# EAGLE board Fuel Gauge v1.0 (EAGLE 8.1.0)
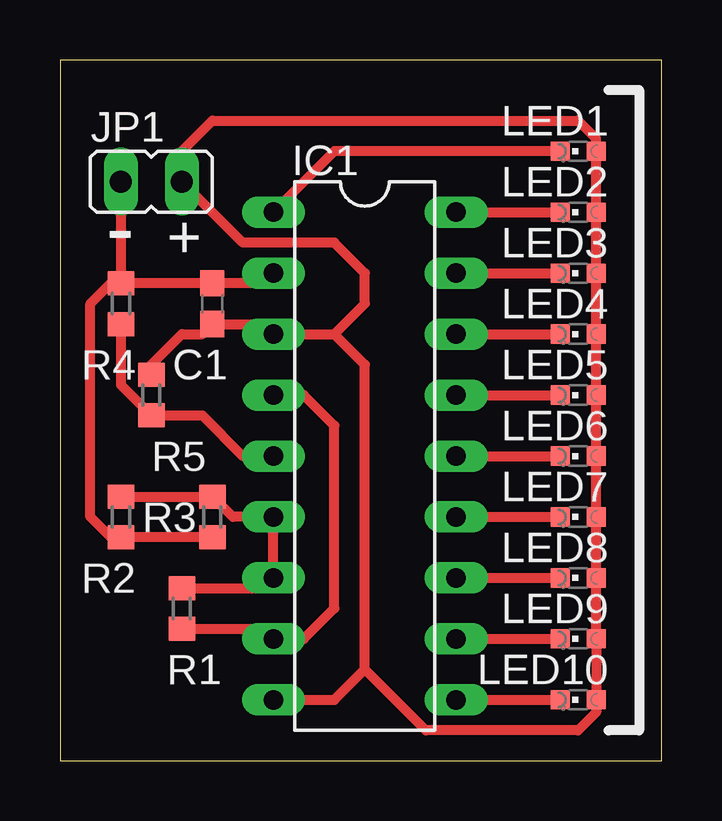
[diagram p0: board, top side]

Size 25.07 x 29.2 mm. Coordinates in mm from the lower left corner, seen from the top.
Outline: 0,0 25.07,0 25.07,29.2 0,29.2 0,0
Copper layers (1*16): Top 0.035mm / dielectric 1.5mm / Bottom 0.035mm
Design rules "default": minimum track width 10mil, minimum drill 24mil, track to track 8mil, track to pad 8mil, pad to pad 8mil, via to via 8mil, smd to smd 8mil, copper to edge 40mil, drill to drill 8mil, minimum pad ring 10mil, minimum via ring 8mil, stop-mask expansion 4mil, vias tented up to drill 0mil, thermal gap 10mil

## Footprints (pad centres in the part's own frame; a part is rotated, then mirrored left to right if it is on the bottom)
C0603 = smd 1.1 x 1: 1 -0.85,0; 2 0.85,0
DIL18 = drill 0.813 long: 1 -10.16,-3.81; 2 -7.62,-3.81; 3 -5.08,-3.81; 4 -2.54,-3.81; 5 0,-3.81; 6 2.54,-3.81; 7 5.08,-3.81; 8 7.62,-3.81; 9 10.16,-3.81; 10 10.16,3.81; 11 7.62,3.81; 12 5.08,3.81; 13 2.54,3.81; 14 0,3.81; 15 -2.54,3.81; 16 -5.08,3.81; 17 -7.62,3.81; 18 -10.16,3.81
JP1 = drill 0.914 long: 1 0,-1.27; 2 0,1.27
CHIPLED_0603 = smd 0.8 x 0.8: A 0,-0.75; C 0,0.75
R0603 = smd 1 x 1.1: 1 -0.85,0; 2 0.85,0

## Placement (x,y rotation side)
C1  1uF  [C0603]  6.35,19.05 90 top
IC1  LM3914N  [DIL18]  12.7,12.7 270 top
JP1  [JP1]  3.81,24.13 270 top
LED1  [CHIPLED_0603]  21.59,25.4 90 top
LED2  [CHIPLED_0603]  21.59,22.86 90 top
LED3  [CHIPLED_0603]  21.59,20.32 90 top
LED4  [CHIPLED_0603]  21.59,17.78 90 top
LED5  [CHIPLED_0603]  21.59,15.24 90 top
LED6  [CHIPLED_0603]  21.59,12.7 90 top
LED7  [CHIPLED_0603]  21.59,10.16 90 top
LED8  [CHIPLED_0603]  21.59,7.62 90 top
LED9  [CHIPLED_0603]  21.59,5.08 90 top
LED10  [CHIPLED_0603]  21.59,2.54 90 top
R1  13k  [R0603]  5.08,6.35 270 top
R2  12k  [R0603]  2.54,10.16 90 top
R3  120k  [R0603]  6.35,10.16 90 top
R4  10k  [R0603]  2.54,19.05 90 top
R5  10k  [R0603]  3.81,15.24 270 top

## Library data of the parts
C1 R1-R5 = resistor
IC1 = national-semiconductor
JP1 = jumper
LED1-LED10 = led

## Nets
GND: C1.2 IC1.2 JP1.1 R2.1 R3.1 R4.2
LED1: IC1.1 LED1.C
LED2: IC1.18 LED2.C
LED3: IC1.17 LED3.C
LED4: IC1.16 LED4.C
LED5: IC1.15 LED5.C
LED6: IC1.14 LED6.C
LED7: IC1.13 LED7.C
LED8: IC1.12 LED8.C
LED9: IC1.11 LED9.C
LED10: IC1.10 LED10.C
REFADJ/RLO: IC1.4 IC1.8 R1.2
REFOUT/RHI: IC1.6 IC1.7 R1.1 R2.2 R3.2
SIGIN: IC1.5 R4.1 R5.2
VBATT: C1.1 IC1.3 IC1.9 JP1.2 LED1.A LED2.A LED3.A LED4.A LED5.A LED6.A LED7.A LED8.A LED9.A LED10.A R5.1

## Tracks (layer width: path | path; a pad name or v marks a point on that pad's centre or on a via)
GND
  Top 0.406: IC1.2 8.47,19.9 C1.2 R4.2 | R3.1 R2.1 2.12,9.31 1.27,10.16 1.27,19.05 2.12,19.9 R4.2 | JP1.1 R4.2
LED1
  Top 0.406: LED1.C 11.43,25.4 IC1.1
LED2
  Top 0.406: IC1.18 LED2.C
LED3
  Top 0.406: IC1.17 LED3.C
LED4
  Top 0.406: IC1.16 LED4.C
LED5
  Top 0.406: IC1.15 LED5.C
LED6
  Top 0.406: IC1.14 LED6.C
LED7
  Top 0.406: IC1.13 LED7.C
LED8
  Top 0.406: IC1.12 LED8.C
LED9
  Top 0.406: IC1.11 LED9.C
LED10
  Top 0.406: IC1.10 LED10.C
REFADJ/RLO
  Top 0.406: IC1.4 10.16,15.24 11.43,13.97 11.43,6.35 10.16,5.08 IC1.8 8.47,5.5 R1.2
REFOUT/RHI
  Top 0.406: R1.1 8.47,7.2 IC1.7 IC1.6 7.2,10.16 R3.2 R2.2
SIGIN
  Top 0.406: IC1.5 7.62,12.7 5.93,14.39 R5.2 2.54,15.66 R4.1
VBATT
  Top 0.406: 11.43,17.78 12.7,16.51 12.7,3.81 | 11.43,17.78 IC1.3 8.47,18.2 C1.1 5.93,17.78 5.08,17.78 3.81,16.51 R5.1 | 11.43,17.78 12.7,19.05 12.7,20.32 11.43,21.59 7.62,21.59 JP1.2 | 5.08,25.4 6.35,26.67 21.59,26.67 22.34,25.92 LED1.A LED2.A LED3.A LED4.A LED5.A LED6.A LED7.A LED8.A LED9.A LED10.A 22.34,2.02 21.59,1.27 15.24,1.27 12.7,3.81 | IC1.9 11.43,2.54 12.7,3.81

## Text on the board
tNames: - | +